# EAGLE board CT_schematic (EAGLE 7.6.0)

Size 100 x 80 mm. Coordinates in mm from the lower left corner, seen from the top.
Outline: 0,0 100,0 100,80 0,80 0,0
Copper layers (1*16): Top 0.035mm / dielectric 1.5mm / Bottom 0.035mm
Design rules "default": minimum track width 10mil, minimum drill 24mil, track to track 8mil, track to pad 8mil, pad to pad 8mil, via to via 8mil, smd to smd 8mil, copper to edge 40mil, drill to drill 8mil, minimum pad ring 10mil, minimum via ring 8mil, stop-mask expansion 4mil, vias tented up to drill 0mil, thermal gap 10mil

## Footprints (pad centres in the part's own frame; a part is rotated, then mirrored left to right if it is on the bottom)
C0603 = smd 0.8 x 0.8: 1 -0.762,0; 2 0.762,0
C0402 = smd 0.5 x 0.5: 1 -0.508,0; 2 0.508,0
R0603 = smd 0.8 x 0.8: 1 -0.762,0; 2 0.762,0
EXV-9B = smd 2.718 x 1.778: 1 -2.108,0; 2 2.108,0
C1210 = smd 1.2 x 2.5: 1 -1.524,0; 2 1.524,0
EXV-9H = smd 3.505 x 1.676: 1 -2.857,0; 2 2.857,0
L0603 = smd 0.8 x 0.8: 1 -0.762,0; 2 0.762,0
IND25X25CZ = smd 2.489 x 3.429: 1 -2.718,0; 2 2.718,0
PJ-037B_PACKAGE = drill 3.7 square: 1 12,0 | drill 3.2 square: 2 6,0
LQFP64 = smd 0.3 x 1.2: 1 -3.75,-5.75; 2 -3.25,-5.75; 3 -2.75,-5.75; 4 -2.25,-5.75; 5 -1.75,-5.75; 6 -1.25,-5.75; 7 -0.75,-5.75; 8 -0.25,-5.75; 9 0.25,-5.75; 10 0.75,-5.75; 11 1.25,-5.75; 12 1.75,-5.75; 13 2.25,-5.75; 14 2.75,-5.75; 15 3.25,-5.75; 16 3.75,-5.75; 33 3.75,5.75; 34 3.25,5.75; 35 2.75,5.75; 36 2.25,5.75; 37 1.75,5.75; 38 1.25,5.75; 39 0.75,5.75; 40 0.25,5.75; 41 -0.25,5.75; 42 -0.75,5.75; 43 -1.25,5.75; 44 -1.75,5.75; 45 -2.25,5.75; 46 -2.75,5.75; 47 -3.25,5.75; 48 -3.75,5.75 | smd 1.2 x 0.3: 17 5.75,-3.75; 18 5.75,-3.25; 19 5.75,-2.75; 20 5.75,-2.25; 21 5.75,-1.75; 22 5.75,-1.25; 23 5.75,-0.75; 24 5.75,-0.25; 25 5.75,0.25; 26 5.75,0.75; 27 5.75,1.25; 28 5.75,1.75; 29 5.75,2.25; 30 5.75,2.75; 31 5.75,3.25; 32 5.75,3.75; 49 -5.75,3.75; 50 -5.75,3.25; 51 -5.75,2.75; 52 -5.75,2.25; 53 -5.75,1.75; 54 -5.75,1.25; 55 -5.75,0.75; 56 -5.75,0.25; 57 -5.75,-0.25; 58 -5.75,-0.75; 59 -5.75,-1.25; 60 -5.75,-1.75; 61 -5.75,-2.25; 62 -5.75,-2.75; 63 -5.75,-3.25; 64 -5.75,-3.75
SOT-23-6 = smd 1.1 x 0.6: 1 -1.4,0.95; 2 -1.4,0; 3 -1.4,-0.95; 4 1.4,-0.95; 5 1.4,0; 6 1.4,0.95
SOIC-8 = smd 1.6 x 0.6: 1 -2.7,1.905 | smd 1.55 x 0.6: 2 -2.7,0.635; 3 -2.7,-0.635; 4 -2.7,-1.905; 5 2.7,-1.905; 6 2.7,-0.635; 7 2.7,0.635; 8 2.7,1.905
SAMTEC_FTSH-105-01-L-DV-K = smd 0.762 x 2.794: 1 -2.54,-2.032; 2 -2.54,2.032; 3 -1.27,-2.032; 4 -1.27,2.032; 5 0,-2.032; 6 0,2.032; 7 1.27,-2.032; 8 1.27,2.032; 9 2.54,-2.032; 10 2.54,2.032
RHB32_3P45X3P45 = smd 0.85 x 0.28: 1 -2.475,1.75; 2 -2.475,1.25; 3 -2.475,0.75; 4 -2.475,0.25; 5 -2.475,-0.25; 6 -2.475,-0.75; 7 -2.475,-1.25; 8 -2.475,-1.75; 17 2.475,-1.75; 18 2.475,-1.25; 19 2.475,-0.75; 20 2.475,-0.25; 21 2.475,0.25; 22 2.475,0.75; 23 2.475,1.25; 24 2.475,1.75 | smd 0.28 x 0.85: 9 -1.75,-2.475; 10 -1.25,-2.475; 11 -0.75,-2.475; 12 -0.25,-2.475; 13 0.25,-2.475; 14 0.75,-2.475; 15 1.25,-2.475; 16 1.75,-2.475; 25 1.75,2.475; 26 1.25,2.475; 27 0.75,2.475; 28 0.25,2.475; 29 -0.25,2.475; 30 -0.75,2.475; 31 -1.25,2.475; 32 -1.75,2.475 | smd 3.45 x 3.45: 33 0,0
USB-A-H = drill 0.914: 1 2.718,3.493; 2 2.718,1.003; 3 2.718,-1.003; 4 2.718,-3.493 | drill 2.311: 5 0,-6.566; 6 0,6.566
SOT143B = smd 1 x 0.7: 1 -0.75,-1 | smd 0.6 x 0.7: 2 0.95,-1; 3 0.95,1; 4 -0.95,1
ABS07-32.768KHZ-7-T = smd 1.1 x 2.4: 1 -2.5,0; 2 0,0
ASFL1 = smd 1.7 x 1.5: 1 -1.27,-1.1; 2 1.27,-1.1; 3 1.27,1.1; 4 -1.27,1.1
LP2954 = smd 1.6 x 0.6: 1 -2.475,1.905 | smd 1.55 x 0.6: 2 -2.475,0.635; 3 -2.475,-0.635; 4 -2.475,-1.905; 5 2.475,-1.905; 6 2.475,-0.635; 7 2.475,0.635; 8 2.475,1.905
WSON-8 = smd 0.3 x 0.6: 1 -0.75,0; 2 0.05,0; 3 0.85,0; 4 1.65,0; 5 1.65,3.8; 6 0.85,3.8; 7 0.05,3.8; 8 -0.75,3.8 | smd 3 x 2.6: PAD 0.45,1.9
IR3899MTR1PBF = smd 0.25 x 0.75: 1 0,0; 2 0.5,0; 3 1,0; 4 1.5,0; 5 2,0; 6 2.5,0; 7 3,0 | smd 0.75 x 0.25: 8 3.425,0.78; 9 3.425,1.28; 10 3.425,1.78; 14 -0.425,1.78; 15 -0.425,1.28; 16 -0.425,0.78 | smd 0.3 x 1.95: 11 3.22,3.63 | smd 1.62 x 2.42: 12 1.786,3.8 | smd 1 x 1.95: 13 0.117,3.63 | smd 2.19 x 1.25: 17 1.51,1.26
SON-6 = smd 0.55 x 0.3: 1 -0.355,0.5 | smd 0.52 x 0.3: 2 -0.37,0; 3 -0.37,-0.5; 4 0.37,-0.5; 5 0.37,0; 6 0.37,0.5
SW_4-1437565-2 = smd 1.4 x 2.1: 1 -2.23,4.55; 2 -2.23,-4.55; 3 2.23,4.55; 4 2.23,-4.55
LGM67K-G1J2-24-Z = smd 0.8 x 1.4: A -2,0; C 0,0
NC7SZ125M5X = smd 1.3 x 0.7: 1 -1.3,0.95; 2 -1.3,0; 3 -1.3,-0.95; 4 1.3,-0.95; 5 1.3,0.95
DUMMY_PACKAGE_226 = drill 0.3: 1 0,-1; 2 1.5,-1; 3 3,-1

## Placement (x,y rotation side)
C1  1e-06  [C0603]  -26.67,77.47 0 top  (outside the outline)
C2  1e-07  [C0603]  -30.48,77.47 0 top  (outside the outline)
C3  1e-07  [C0603]  -34.29,77.47 0 top  (outside the outline)
C4  1e-07  [C0603]  -38.1,77.47 0 top  (outside the outline)
C5  1e-07  [C0603]  -41.91,77.47 0 top  (outside the outline)
C6  1e-07  [C0603]  -45.72,77.47 0 top  (outside the outline)
C7  4.7e-06  [C0603]  -74.93,72.39 0 top  (outside the outline)
C8  2.2e-06  [C0603]  -78.74,72.39 0 top  (outside the outline)
C9  2.2e-06  [C0603]  -82.55,72.39 0 top  (outside the outline)
C10  1e-08  [C0603]  -49.53,77.47 0 top  (outside the outline)
C11  1e-06  [C0603]  -53.34,77.47 0 top  (outside the outline)
C12  1e-11  [C0402]  -38.1,82.55 0 top  (outside the outline)
C13  1e-11  [C0402]  -41.91,82.55 0 top  (outside the outline)
C14  1e-08  [C0402]  -45.72,82.55 0 top  (outside the outline)
C15  1e-07  [C0402]  -49.53,82.55 0 top  (outside the outline)
C16  1e-07  [C0402]  -53.34,82.55 0 top  (outside the outline)
C17  2.2e-06  [C0603]  -15.24,77.47 0 top  (outside the outline)
C18  1e-07  [C0402]  -57.15,82.55 0 top  (outside the outline)
C19  1e-07  [C0402]  -60.96,82.55 0 top  (outside the outline)
C20  2.2e-06  [C0603]  -19.05,77.47 0 top  (outside the outline)
C21  0.0001  [R0603]  -57.15,77.47 0 top  (outside the outline)
C22  1e-08  [C0402]  -64.77,82.55 0 top  (outside the outline)
C23  1e-08  [C0402]  -68.58,82.55 0 top  (outside the outline)
C24  1e-06  [EXV-9B]  -62.23,53.34 0 top  (outside the outline)
C25  2.2e-06  [EXV-9B]  -71.12,53.34 0 top  (outside the outline)
C26  8e-07  [R0603]  -60.96,77.47 0 top  (outside the outline)
C27  1e-05  [C1210]  -48.26,53.34 0 top  (outside the outline)
C28  0.0001  [C1210]  -54.61,53.34 0 top  (outside the outline)
C29  2.2e-06  [C0603]  -22.86,77.47 0 top  (outside the outline)
C30  1e-07  [C0402]  -72.39,82.55 0 top  (outside the outline)
C31  1e-07  [C0402]  -76.2,82.55 0 top  (outside the outline)
C32  8.8006443804346e-09  [R0603]  -44.45,60.96 0 top  (outside the outline)
C33  3.0002196751482e-07  [R0603]  -54.61,60.96 0 top  (outside the outline)
C36  1e-07  [C0402]  -80.01,82.55 0 top  (outside the outline)
C37  0.0001  [EXV-9H]  -35.56,44.45 0 top  (outside the outline)
C38  0.0001  [EXV-9H]  -46.99,44.45 0 top  (outside the outline)
C39  1e-08  [C0402]  -83.82,82.55 0 top  (outside the outline)
C40  1e-08  [C0402]  -15.24,87.63 0 top  (outside the outline)
C41  1e-08  [C0402]  -19.05,87.63 0 top  (outside the outline)
F1  240.0  [L0603]  -64.77,77.47 0 top  (outside the outline)
I1  6.8e-07  [IND25X25CZ]  -57.15,44.45 0 top  (outside the outline)
J1  PJ-037B  [PJ-037B_PACKAGE]  -27.94,24.13 0 top  (outside the outline)
R1  10000.0  [R0603]  -45.72,67.31 0 top  (outside the outline)
R2  1000.0  [R0603]  -68.58,77.47 0 top  (outside the outline)
R3  910.0  [R0603]  -72.39,77.47 0 top  (outside the outline)
R4  4700.0  [R0603]  -76.2,77.47 0 top  (outside the outline)
R5  4700.0  [R0603]  -80.01,77.47 0 top  (outside the outline)
R6  47000.0  [R0603]  -50.8,67.31 0 top  (outside the outline)
R7  10000.0  [R0603]  -55.88,67.31 0 top  (outside the outline)
R8  1270.0  [R0603]  -15.24,82.55 0 top  (outside the outline)
R9  10000.0  [R0603]  -60.96,67.31 0 top  (outside the outline)
R10  10000.0  [R0603]  -66.04,67.31 0 top  (outside the outline)
R11  10000.0  [R0603]  -71.12,67.31 0 top  (outside the outline)
R12  10000.0  [R0603]  -76.2,67.31 0 top  (outside the outline)
R13  10000.0  [R0603]  -81.28,67.31 0 top  (outside the outline)
R14  10000.0  [R0603]  -15.24,72.39 0 top  (outside the outline)
R15  10000.0  [R0603]  -20.32,72.39 0 top  (outside the outline)
R16  10000.0  [R0603]  -25.4,72.39 0 top  (outside the outline)
R17  5.0  [R0603]  -19.05,82.55 0 top  (outside the outline)
R18  47000.0  [R0603]  -30.48,72.39 0 top  (outside the outline)
R19  10000.0  [R0603]  -35.56,72.39 0 top  (outside the outline)
R20  10000.0  [R0603]  -40.64,72.39 0 top  (outside the outline)
R21  100000.0  [R0603]  -80.01,60.96 0 top  (outside the outline)
R22  100000.0  [R0603]  -15.24,67.31 0 top  (outside the outline)
R23  47000.0  [R0603]  -45.72,72.39 0 top  (outside the outline)
R24  100000.0  [R0603]  -20.32,67.31 0 top  (outside the outline)
R25  100000.0  [R0603]  -25.4,67.31 0 top  (outside the outline)
R26  153694.38  [R0603]  -74.93,60.96 0 top  (outside the outline)
R27  100000.0  [R0603]  -30.48,67.31 0 top  (outside the outline)
R28  0.1  [R0603]  -22.86,82.55 0 top  (outside the outline)
R29  4030.2416170974  [R0603]  -62.23,60.96 0 top  (outside the outline)
R30  453.0  [R0603]  -26.67,82.55 0 top  (outside the outline)
R31  57.923764705882  [R0603]  -69.85,60.96 0 top  (outside the outline)
R32  130.0  [R0603]  -30.48,82.55 0 top  (outside the outline)
R33  39000.0  [R0603]  -50.8,72.39 0 top  (outside the outline)
R34  49900.0  [R0603]  -55.88,72.39 0 top  (outside the outline)
R35  5100.0  [R0603]  -34.29,82.55 0 top  (outside the outline)
R36  10000.0  [R0603]  -60.96,72.39 0 top  (outside the outline)
R37  10000.0  [R0603]  -66.04,72.39 0 top  (outside the outline)
R38  82000.0  [R0603]  -71.12,72.39 0 top  (outside the outline)
R39  300000.0  [R0603]  -35.56,67.31 0 top  (outside the outline)
R40  120000.0  [R0603]  -40.64,67.31 0 top  (outside the outline)
U1  STM32F205RCT7  [LQFP64]  -40.64,24.13 0 top  (outside the outline)
U2  MAX4995AAUT+T  [SOT-23-6]  -78.74,52.07 0 top  (outside the outline)
U3  AT25010B-SSHL-T  [SOIC-8]  -41.91,35.56 0 top  (outside the outline)
U4  FTSH-105-01-L-DV-K  [SAMTEC_FTSH-105-01-L-DV-K]  -69.85,7.62 0 top  (outside the outline)
U5  TUSB1210BRHBR  [RHB32_3P45X3P45]  -64.77,44.45 0 top  (outside the outline)
U6  61400416021  [USB-A-H]  -19.05,8.89 0 top  (outside the outline)
U7  prtr5v0u2ax  [SOT143B]  -31.75,87.63 0 top  (outside the outline)
U8  MAX4995AAUT+T  [SOT-23-6]  -15.24,59.69 0 top  (outside the outline)
U9  61400416021  [USB-A-H]  -36.83,8.89 0 top  (outside the outline)
U10  prtr5v0u2ax  [SOT143B]  -44.45,87.63 0 top  (outside the outline)
U11  ABS07-32.768KHZ-7-T  [ABS07-32.768KHZ-7-T]  -27.94,54.61 0 top  (outside the outline)
U12  ASFL1-19.2MHZ-NCS  [ASFL1]  -80.01,35.56 0 top  (outside the outline)
U13  ASFL1-25MHZ-NCS  [ASFL1]  -26.67,45.72 0 top  (outside the outline)
U14  LP2954AIMX/NOPB  [LP2954]  -25.4,35.56 0 top  (outside the outline)
U15  LP2951ACSDX/NOPB  [WSON-8]  -62.23,34.29 0 top  (outside the outline)
U16  IR3899MTR1PBF  [IR3899MTR1PBF]  -78.74,20.32 0 top  (outside the outline)
U17  TPS3895ADRYR  [SON-6]  -53.34,86.36 0 top  (outside the outline)
U18  4-1437565-2  [SW_4-1437565-2]  -62.23,24.13 0 top  (outside the outline)
U19  Q65110A2395  [LGM67K-G1J2-24-Z]  -36.83,53.34 0 top  (outside the outline)
U20  nc7sz125m5x  [NC7SZ125M5X]  -20.32,60.96 0 top  (outside the outline)
U21  nc7sz125m5x  [NC7SZ125M5X]  -26.67,60.96 0 top  (outside the outline)
U22  nc7sz125m5x  [NC7SZ125M5X]  -33.02,60.96 0 top  (outside the outline)
U23  Dummy  [DUMMY_PACKAGE_226]  -50.8,87.63 0 top  (outside the outline)

## Library data of the parts
C1-C33 C36-C41 F1 I1 J1 R1-R40 U1-U23 = circuit_tree

## Nets
CLK_CRYSTAL_U1_3: C12.1 U1.3 U11.1
CLK_CRYSTAL_U1_4: C13.1 U1.4 U11.2
CLK_U1_5: U1.5 U13.3
CLK_U5_1: U5.1 U12.3
GND: C1.2 C2.2 C3.2 C4.2 C5.2 C6.2 C7.2 C8.2 C9.2 C10.2 C11.2 C12.2 C13.2 C14.2 C15.2 C16.2 C17.2 C18.2 C19.2 C20.2 C21.2 C22.2 C23.2 C24.2 C25.2 C26.2 C27.2 C29.2 C30.2 C31.2 C36.2 C37.2 C38.2 C39.2 C40.2 C41.2 J1.2 R2.2 R6.2 R7.2 R8.2 R10.2 R17.2 R18.2 R20.2 R24.2 R27.2 R28.1 R28.2 R30.2 R33.2 R35.2 R38.2 R40.2 U1.12 U1.18 U1.63 U2.2 U3.4 U4.3 U4.5 U5.23 U5.33 U6.4 U6.5 U6.6 U7.1 U8.2 U9.4 U9.5 U9.6 U10.1 U12.2 U13.2 U14.4 U15.3 U15.4 U15.PAD U16.4 U16.11 U16.17 U17.2 U19.C U20.2 U20.3 U21.1 U21.3 U22.1 U22.3 U23.1
NET_U1_7: R4.1 U1.7 U21.4
NET_U1_13: C10.1 C11.1 F1.1 U1.13
NET_U1_31: C8.1 U1.31
NET_U1_47: C9.1 U1.47
NET_U1_60: R7.1 U1.60
NET_U1_61: R3.1 U1.61 U19.A
NET_U1_62: R1.1 U1.62 U18.3 U18.4
NET_U2_3: R6.1 U2.3
NET_U3_3: R11.1 U3.3
NET_U3_7: R13.1 U3.7
NET_U4_9: R17.1 U4.9
NET_U5_11: R19.1 U5.11
NET_U5_12: C20.1 U5.12
NET_U5_14: R20.1 U5.14
NET_U5_20: C17.1 U5.20
NET_U5_27: R5.1 U5.27 U22.4
NET_U6_1: C21.1 U5.22 U6.1 U7.4 U8.1
NET_U6_2: U5.19 U6.2 U7.3
NET_U6_3: U5.18 U6.3 U7.2
NET_U8_3: R18.1 U8.3
NET_U8_4: U5.17 U8.4
NET_U14_3: R22.1 U14.3
NET_U14_5: R21.1 U14.5
NET_U14_7: R23.2 R24.1 U14.7
NET_U15_5: R25.1 U15.5
NET_U15_7: R26.2 R27.1 U15.7
NET_U16_1: C32.1 R29.1 R30.1 R31.1 R32.1 U16.1 U16.8
NET_U16_2: C31.1 U16.2
NET_U16_3: C32.2 C33.1 C33.2 U16.3
NET_U16_5: R33.1 U16.5
NET_U16_10: C29.1 U16.10
NET_U16_12: C28.1 I1.1 U16.12
NET_U16_13: U16.13
NET_U16_14: C28.2 U16.14
NET_U16_15: R34.1 R35.1 U16.15
NET_U16_ATNET_3: I1.2 R29.2
NET_U16_ATNET_4: C33.2 R31.2
NET_U16_ATNET_5: R32.2
NET_U17_1: R37.1 R38.1 U17.1
NET_U17_3: R39.2 R40.1 U17.3
NET_U17_4: R36.1 U17.4 U20.4 U21.2 U22.2
NET_U18_1: R2.1 U18.1 U18.2
PROC_GPIO_TO_U1_USB_FAULT: R9.1 U1.6 U2.6
PROC_GPIO_TO_U1_VBUS_EN: R10.1 U1.2 U2.4
PROC_SPI3_MISO: U1.52 U3.2
PROC_SPI3_MOSI: U1.53 U3.5
PROC_SPI3_NSS: R12.1 U1.20 U3.1
PROC_SPI3_SCK: U1.51 U3.6
PROC_SYS_JTCK_SWCLK: R15.1 U1.49 U4.4
PROC_SYS_JTDO_SWO: U1.55 U4.6
PROC_SYS_JTMS_SWDIO: R16.1 U1.46 U4.2
PROC_TIM1_CH1: U1.41 U23.3
PROC_TIM1_CH3: R8.1 U1.43 U23.2
PROC_USB_OTG_FS_DM: U1.44 U9.2 U10.3
PROC_USB_OTG_FS_DP: U1.45 U9.3 U10.2
PROC_USB_OTG_FS_VBUS: U1.42 U2.1 U9.1 U10.4
PROC_USB_OTG_HS_ULPI_CK: U1.21 U5.26
PROC_USB_OTG_HS_ULPI_D0: U1.17 U5.3
PROC_USB_OTG_HS_ULPI_D1: U1.26 U5.4
PROC_USB_OTG_HS_ULPI_D2: U1.27 U5.5
PROC_USB_OTG_HS_ULPI_D3: U1.29 U5.6
PROC_USB_OTG_HS_ULPI_D4: U1.30 U5.7
PROC_USB_OTG_HS_ULPI_D5: U1.33 U5.9
PROC_USB_OTG_HS_ULPI_D6: U1.34 U5.10
PROC_USB_OTG_HS_ULPI_D7: U1.57 U5.13
PROC_USB_OTG_HS_ULPI_DIR: U1.10 U5.31
PROC_USB_OTG_HS_ULPI_NXT: U1.11 U5.2
PROC_USB_OTG_HS_ULPI_STP: U1.8 U5.29
RST_OUT_U4_JTAG_RST_B: R14.1 U4.10 U20.1
VCC_S1_17V0: C24.1 C26.1 C30.1 C37.1 C38.1 J1.1 R22.2 R34.2 U14.8 U15.8 U16.9
VCC_TIER1_1V8: C1.1 C2.1 C3.1 C4.1 C5.1 C6.1 C7.1 C14.1 C15.1 C18.1 C19.1 C25.1 C36.1 C39.1 C40.1 C41.1 F1.2 R1.2 R3.2 R4.2 R5.2 R9.2 R11.2 R12.2 R13.2 R14.2 R15.2 R16.2 R19.2 R21.2 R23.1 R36.2 R37.2 R39.1 U1.1 U1.19 U1.32 U1.48 U1.64 U3.8 U4.1 U5.28 U5.30 U5.32 U14.1 U17.6 U20.5 U21.5 U22.5
VCC_TIER1_3V3: C16.1 C22.1 C23.1 C27.1 R25.2 R26.1 U5.21 U12.4 U13.4 U15.1
VCC_TIER1_5V0: I1.2 R29.2 U2.5 U8.5

## Tracks (layer width: path | path; a pad name or v marks a point on that pad's centre or on a via)
CLK_CRYSTAL_U1_3  (2 unrouted)
CLK_CRYSTAL_U1_4  (2 unrouted)
CLK_U1_5  (1 unrouted)
CLK_U5_1  (1 unrouted)
GND  (89 unrouted)
NET_U1_7  (2 unrouted)
NET_U1_13  (3 unrouted)
NET_U1_31  (1 unrouted)
NET_U1_47  (1 unrouted)
NET_U1_60  (1 unrouted)
NET_U1_61  (2 unrouted)
NET_U1_62  (3 unrouted)
NET_U2_3  (1 unrouted)
NET_U3_3  (1 unrouted)
NET_U3_7  (1 unrouted)
NET_U4_9  (1 unrouted)
NET_U5_11  (1 unrouted)
NET_U5_12  (1 unrouted)
NET_U5_14  (1 unrouted)
NET_U5_20  (1 unrouted)
NET_U5_27  (2 unrouted)
NET_U6_1  (4 unrouted)
NET_U6_2  (2 unrouted)
NET_U6_3  (2 unrouted)
NET_U8_3  (1 unrouted)
NET_U8_4  (1 unrouted)
NET_U14_3  (1 unrouted)
NET_U14_5  (1 unrouted)
NET_U14_7  (2 unrouted)
NET_U15_5  (1 unrouted)
NET_U15_7  (2 unrouted)
NET_U16_1  (6 unrouted)
NET_U16_2  (1 unrouted)
NET_U16_3  (3 unrouted)
NET_U16_5  (1 unrouted)
NET_U16_10  (1 unrouted)
NET_U16_12  (2 unrouted)
NET_U16_14  (1 unrouted)
NET_U16_15  (2 unrouted)
NET_U16_ATNET_3  (1 unrouted)
NET_U16_ATNET_4  (1 unrouted)
NET_U17_1  (2 unrouted)
NET_U17_3  (2 unrouted)
NET_U17_4  (4 unrouted)
NET_U18_1  (2 unrouted)
PROC_GPIO_TO_U1_USB_FAULT  (2 unrouted)
PROC_GPIO_TO_U1_VBUS_EN  (2 unrouted)
PROC_SPI3_MISO  (1 unrouted)
PROC_SPI3_MOSI  (1 unrouted)
PROC_SPI3_NSS  (2 unrouted)
PROC_SPI3_SCK  (1 unrouted)
PROC_SYS_JTCK_SWCLK  (2 unrouted)
PROC_SYS_JTDO_SWO  (1 unrouted)
PROC_SYS_JTMS_SWDIO  (2 unrouted)
PROC_TIM1_CH1  (1 unrouted)
PROC_TIM1_CH3  (2 unrouted)
PROC_USB_OTG_FS_DM  (2 unrouted)
PROC_USB_OTG_FS_DP  (2 unrouted)
PROC_USB_OTG_FS_VBUS  (3 unrouted)
PROC_USB_OTG_HS_ULPI_CK  (1 unrouted)
PROC_USB_OTG_HS_ULPI_D0  (1 unrouted)
PROC_USB_OTG_HS_ULPI_D1  (1 unrouted)
PROC_USB_OTG_HS_ULPI_D2  (1 unrouted)
PROC_USB_OTG_HS_ULPI_D3  (1 unrouted)
PROC_USB_OTG_HS_ULPI_D4  (1 unrouted)
PROC_USB_OTG_HS_ULPI_D5  (1 unrouted)
PROC_USB_OTG_HS_ULPI_D6  (1 unrouted)
PROC_USB_OTG_HS_ULPI_D7  (1 unrouted)
PROC_USB_OTG_HS_ULPI_DIR  (1 unrouted)
PROC_USB_OTG_HS_ULPI_NXT  (1 unrouted)
PROC_USB_OTG_HS_ULPI_STP  (1 unrouted)
RST_OUT_U4_JTAG_RST_B  (2 unrouted)
VCC_S1_17V0  (10 unrouted)
VCC_TIER1_1V8  (48 unrouted)
VCC_TIER1_3V3  (9 unrouted)
VCC_TIER1_5V0  (3 unrouted)